# Altium PCB RFID2.PcbDoc (part 3 of 3)
Units mil, origin at the board's own origin, x right, y up, seen from the top; angles counter-clockwise.
Board outline 2824.02 x 3937.01 mil, 2 copper layers (Top Layer, Bottom Layer); 76 components, 32 nets, 236 pads, 16 vias.
Unrouted connection lines stored in the file: 34.
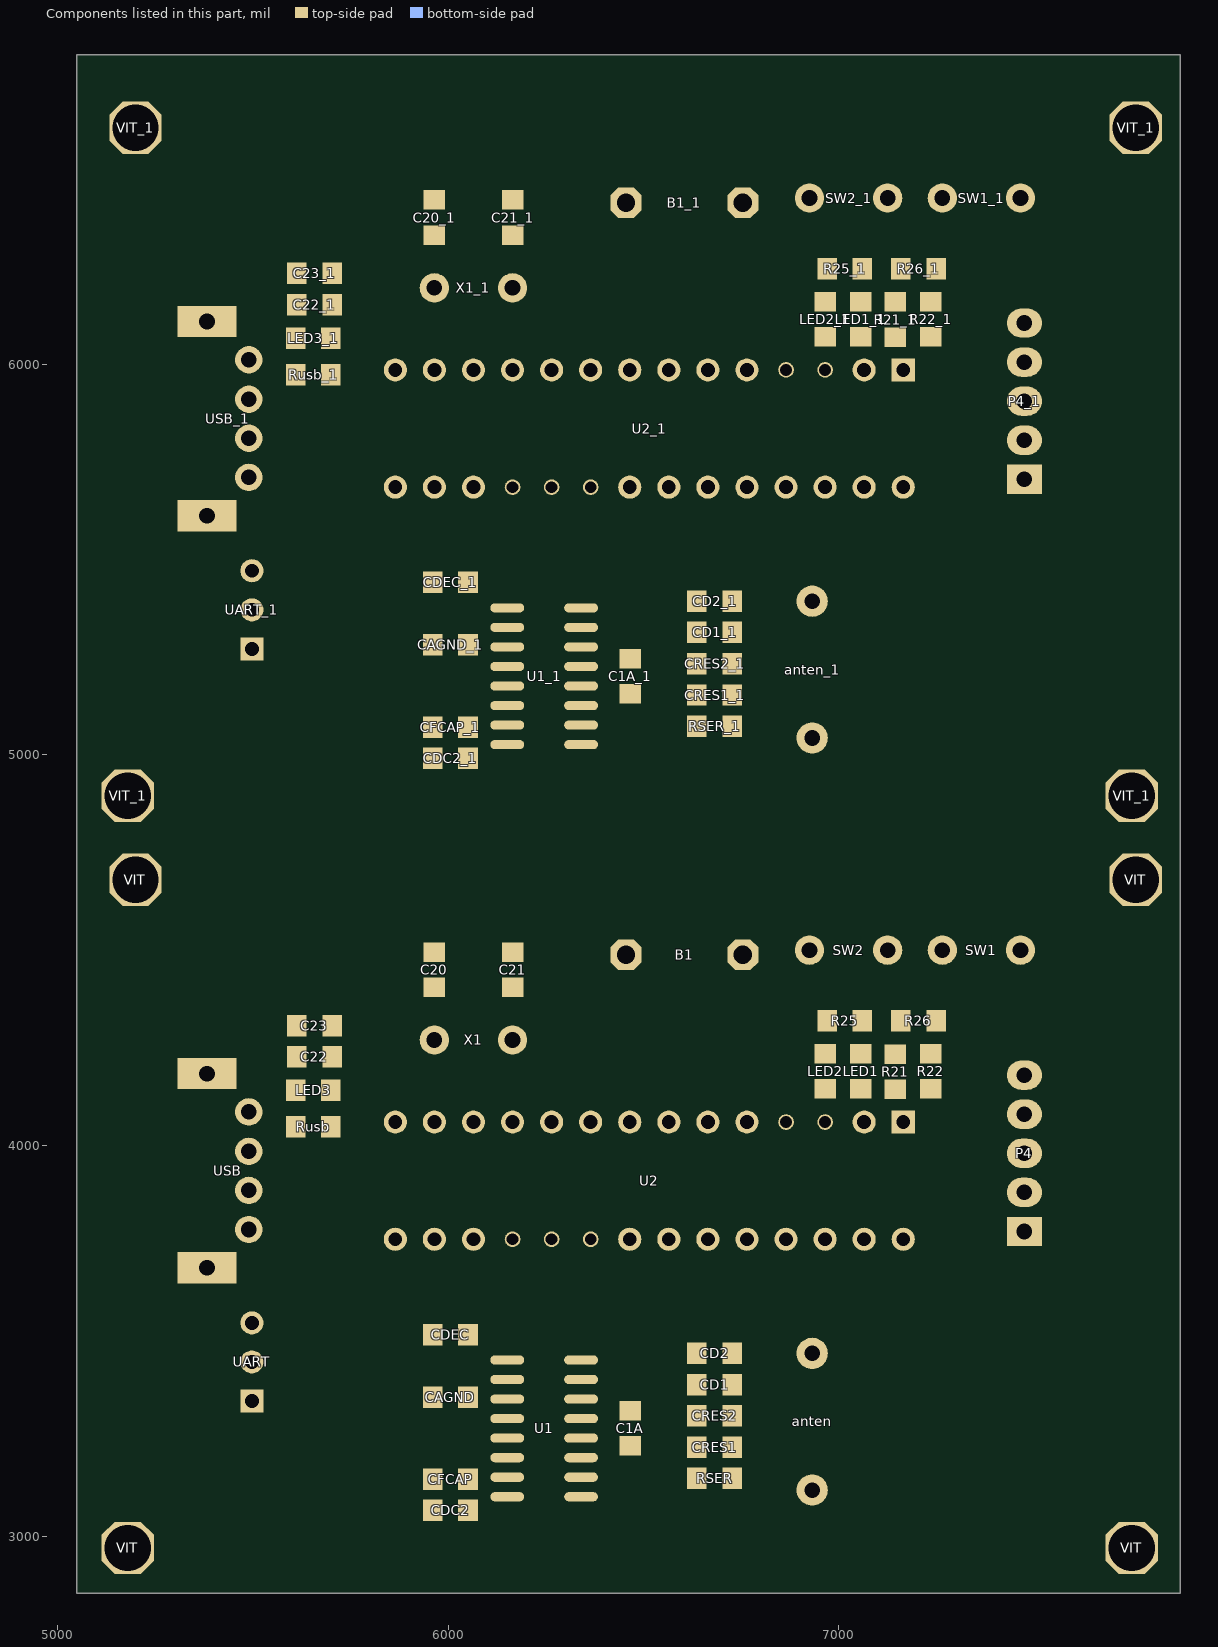
[diagram p3: the components of this part, seen from the top]

## Via types
v1: diameter 50, hole 30, Top Layer to Bottom Layer, 16 vias

## Nets (pads, with @x,y where several pads share a name; then routed paths per layer and width w, separated by ;. In a path a pad name is that pad's centre, name@x,y a point inside that pad or via, vN(x,y) a via of type N, cw(c..) or ccw(c..) an arc to the next point about the centre after c; other vN are vias at no path point) (continued)
copper on no net: (continued)
  Top Layer w1: 7576.88,3261.24 7579.88,3261.24 ; 7576.88,3262.24 7579.88,3262.24 ; 7576.88,3263.24 7579.88,3263.24 ; 7576.88,3264.24 7579.88,3264.24 ; 7576.88,3265.24 7579.88,3265.24 ; 7576.88,3266.24 7579.88,3266.24 ; 7576.88,3267.24 7579.88,3267.24 ; 7576.88,3268.24 7579.88,3268.24 ; 7576.88,3269.24 7579.88,3269.24 ; 7576.88,3270.24 7579.88,3270.24 ; 7576.88,3271.24 7579.88,3271.24 ; 7576.88,3272.24 7579.88,3272.24 ; 7576.88,3273.24 7579.88,3273.24 ; 7576.88,3274.24 7579.88,3274.24 ; 7576.88,3275.24 7579.88,3275.24 ; 7576.88,3276.24 7579.88,3276.24 ; 7576.88,3277.24 7579.88,3277.24 ; 7576.88,3278.24 7579.88,3278.24 ; 7576.88,3279.24 7579.88,3279.24 ; 7576.88,3280.24 7579.88,3280.24 ; 7576.88,3281.24 7579.88,3281.24 ; 7576.88,3282.24 7579.88,3282.24 ; 7576.88,3283.24 7579.88,3283.24 ; 7576.88,3284.24 7579.88,3284.24 ; 7576.88,3285.24 7579.88,3285.24 ; 7576.88,3286.24 7579.88,3286.24 ; 7576.88,3287.24 7579.88,3287.24 ; 7576.88,3288.24 7579.88,3288.24 ; 7576.88,3289.24 7579.88,3289.24 ; 7576.88,3290.24 7579.88,3290.24 ; 7576.88,3291.24 7579.88,3291.24 ; 7576.88,3292.24 7579.88,3292.24 ; 7576.88,3293.24 7579.88,3293.24 ; 7576.88,3294.24 7579.88,3294.24 ; 7576.88,3295.24 7579.88,3295.24 ; 7576.88,3296.24 7579.88,3296.24 ; 7576.88,3297.24 7579.88,3297.24 ; 7576.88,3298.24 7579.88,3298.24 ; 7576.88,3299.24 7579.88,3299.24 ; 7576.88,3300.24 7579.88,3300.24 ; 7576.88,3301.24 7579.88,3301.24 ; 7576.88,3302.24 7579.88,3302.24 ; 7576.88,3303.24 7579.88,3303.24 ; 7576.88,3304.24 7579.88,3304.24 ; 7576.88,3305.24 7579.88,3305.24 ; 7576.88,3306.24 7579.88,3306.24 ; 7576.88,3307.24 7579.88,3307.24 ; 7576.88,3308.24 7579.88,3308.24 ; 7576.88,3309.24 7579.88,3309.24 ; 7576.88,3310.24 7579.88,3310.24 ; 7576.88,3311.24 7579.88,3311.24 ; 7576.88,3312.24 7579.88,3312.24 ; 7576.88,3313.24 7579.88,3313.24 ; 7576.88,3314.24 7579.88,3314.24 ; 7576.88,3315.24 7579.88,3315.24 ; 7576.88,3316.24 7579.88,3316.24 ; 7576.88,3317.24 7579.88,3317.24 ; 7576.88,3318.24 7579.88,3318.24 ; 7576.88,3319.24 7579.88,3319.24 ; 7576.88,3320.24 7579.88,3320.24 ; 7576.88,3321.24 7579.88,3321.24 ; 7576.88,3322.24 7579.88,3322.24 ; 7576.88,3323.24 7579.88,3323.24 ; 7576.88,3324.24 7579.88,3324.24 ; 7576.88,3325.24 7579.88,3325.24 ; 7576.88,3326.24 7579.88,3326.24 ; 7576.88,3327.24 7579.88,3327.24 ; 7576.88,3328.24 7579.88,3328.24 ; 7576.88,3329.24 7579.88,3329.24 ; 7576.88,3330.24 7579.88,3330.24 ; 7576.88,3331.24 7579.88,3331.24 ; 7576.88,3332.24 7579.88,3332.24 ; 7576.88,3333.24 7579.88,3333.24 ; 7576.88,3334.24 7579.88,3334.24 ; 7576.88,3335.24 7579.88,3335.24 ; 7576.88,3336.24 7579.88,3336.24 ; 7576.88,3337.24 7579.88,3337.24 ; 7576.88,3338.24 7579.88,3338.24 ; 7576.88,3339.24 7579.88,3339.24 ; 7576.88,3340.24 7579.88,3340.24 ; 7576.88,3341.24 7579.88,3341.24 ; 7576.88,3342.24 7579.88,3342.24 ; 7576.88,3343.24 7579.88,3343.24 ; 7576.88,3344.24 7579.88,3344.24 ; 7576.88,3345.24 7579.88,3345.24 ; 7576.88,3346.24 7579.88,3346.24 ; 7576.88,3347.24 7579.88,3347.24 ; 7576.88,3348.24 7579.88,3348.24 ; 7576.88,3349.24 7579.88,3349.24 ; 7576.88,3350.24 7579.88,3350.24 ; 7576.88,3351.24 7579.88,3351.24 ; 7576.88,3352.24 7579.88,3352.24 ; 7576.88,3353.24 7579.88,3353.24 ; 7576.88,3354.24 7579.88,3354.24 ; 7576.88,3355.24 7579.88,3355.24 ; 7576.88,3356.24 7579.88,3356.24 ; 7576.88,3357.24 7579.88,3357.24 ; 7576.88,3358.24 7579.88,3358.24 ; 7576.88,3359.24 7579.88,3359.24 ; 7576.88,3360.24 7579.88,3360.24 ; 7576.88,3361.24 7579.88,3361.24 ; 7576.88,3362.24 7579.88,3362.24 ; 7576.88,3363.24 7579.88,3363.24 ; 7576.88,3364.24 7579.88,3364.24 ; 7576.88,3365.24 7579.88,3365.24

## Polygon pours and split planes (outlines as drawn)
GND on Top Layer "Top Layer-No Net" (solid, remove dead copper, pour order 5): 5090,4800 5090,6700 7850,6700 7850,4800
GND on Bottom Layer "Top Layer-No Net" (solid, remove dead copper, pour order 7): 5090,6700 5090,4805 7845,4805 7850,4800 7850,6700

## Keep-outs
Keep-Out Layer:
  lines w3.94: 5050,2854.33 7874.02,2854.33 7874.02,6791.34 5050,6791.34 5050,2854.33 ; 5090,2875 7775,2875 7850,2875 7850,4775 5090,4775 5090,2875 ; 5090,4800 5090,6700 7850,6700 7850,4800 7775,4800 5090,4800

## Other copper
Top Layer:
  text "Binhbut" at 7380,5090 h60
  text "Binhbut" at 7390,3150 h60